# EAGLE board bedofnails (EAGLE 6.5.0)

Size 85.62 x 49.37 mm. Coordinates in mm from the lower left corner, seen from the top.
Outline: 0,49.37 0,0 85.62,0 85.62,49.37 0,49.37
Copper layers (1*16): Top 0.035mm / dielectric 1.5mm / Bottom 0.035mm
Design rules "ITead_rule *": minimum track width 6mil, minimum drill 12mil, track to track 6mil, track to pad 6mil, pad to pad 6mil, via to via 6mil, smd to smd 0mil, copper to edge 10mil, drill to drill 10mil, minimum pad ring 10mil, minimum via ring 6mil, stop-mask expansion 2mil, vias tented up to drill 100mil, thermal gap 10mil
Net classes: 0 default: width 0.203 mm; 1 adc: width 0.203 mm; 2 power: width 0.279 mm, drill 0.254 mm
Holes 0.6 mm at 78.28,34.8 83.23,42.55 9.7,20.45 8.43,30.86 3.48,30.86 4.37,5.71

## Footprints (pad centres in the part's own frame; a part is rotated, then mirrored left to right if it is on the bottom)
SMD-TESTPOINT = smd 1.27 x 0.635: 1 0,0 | hole 0.6: 0,0
KEYSTONE-SMD-TESTPOINT-5015 = smd 2.54 x 1.27: 1 0,0
TESTPAD-PTH-0.7MM = drill 0.7 pad 1.778: 1 0,0
--MERGED_KEYSTONE-SMD-TESTPOINT-5015 = smd 3.429 x 1.778: 1 0,0
STAND-OFF-TIGHT = hole 3.048: 0,0

## Placement (x,y rotation side)
ADC_CLK_TP  TESTPAD  [SMD-TESTPOINT]  50.72,23.24 90 bottom
ADC_NOE_TP  TESTPAD  [SMD-TESTPOINT]  37.95,23.1 90 bottom
CROSS_HI_TP  TESTPAD  [SMD-TESTPOINT]  31.42,9.4 90 bottom
CROSS_LO_TP  TESTPAD  [SMD-TESTPOINT]  33.07,12.57 270 bottom
DBG_TP  TESTPAD  [SMD-TESTPOINT]  39.67,5.59 180 bottom
FPGA_DOUT_TP  TESTPAD  [SMD-TESTPOINT]  43.99,11.56 270 bottom
FPGA_NINIT_TP  TESTPAD  [SMD-TESTPOINT]  58.85,22.23 0 bottom
FPGA_NINIT_TP1  TESTPAD  [SMD-TESTPOINT]  31.78,21.53 90 bottom
FPGA_NINIT_TP2  TESTPAD  [SMD-TESTPOINT]  30.65,23.5 90 bottom
LED_A_TP  TESTPAD  [SMD-TESTPOINT]  61.64,7.49 0 bottom
MISO_TP  TESTPAD  [SMD-TESTPOINT]  54.02,12.32 180 bottom
MOSI_TP  TESTPAD  [SMD-TESTPOINT]  54.78,10.92 180 bottom
NCS_TP  TESTPAD  [SMD-TESTPOINT]  64.69,12.95 0 bottom
OE1_TP  TESTPAD  [SMD-TESTPOINT]  42.08,22.86 270 bottom
OE2_TP  TESTPAD  [SMD-TESTPOINT]  40.29,23.27 270 bottom
OE3_TP  TESTPAD  [SMD-TESTPOINT]  39.67,8 0 bottom
OE4_TP  TESTPAD  [SMD-TESTPOINT]  39.67,6.99 0 bottom
PCK0_TP  TESTPAD  [SMD-TESTPOINT]  44.75,6.1 270 bottom
PWR_HI_TP  TESTPAD  [SMD-TESTPOINT]  39.16,12.83 0 bottom
PWR_LO_TP  TESTPAD  [SMD-TESTPOINT]  39.16,11.56 0 bottom
RELAY_ON_TP  TESTPAD  [SMD-TESTPOINT]  63.8,24.26 270 bottom
SPARE_FPGA_TP  TESTPAD  [SMD-TESTPOINT]  42.97,17.65 0 bottom
SPCK_TP  TESTPAD  [SMD-TESTPOINT]  50.59,5.97 0 bottom
TP1  TESTPAD  [SMD-TESTPOINT]  32.69,27.18 270 bottom
TP2  TESTPADKEYSTONE-SMD  [KEYSTONE-SMD-TESTPOINT-5015]  4.37,5.71 0 bottom
TP3  TESTPADKEYSTONE-SMD  [KEYSTONE-SMD-TESTPOINT-5015]  9.7,20.45 180 top
TP4  TESTPADKEYSTONE-SMD  [KEYSTONE-SMD-TESTPOINT-5015]  8.43,30.86 180 top
TP5  TESTPADKEYSTONE-SMD  [KEYSTONE-SMD-TESTPOINT-5015]  3.48,30.86 180 top
TP6  TESTPAD  [SMD-TESTPOINT]  63.55,7.37 0 bottom
TP8  TESTPAD0.7MM-ROUND-DRILLED  [TESTPAD-PTH-0.7MM]  76.75,32 180 top
TP9  TESTPADKEYSTONE-SMD  [--MERGED_KEYSTONE-SMD-TESTPOINT-5015]  83.23,42.55 90 bottom
TP10  TESTPADKEYSTONE-SMD  [--MERGED_KEYSTONE-SMD-TESTPOINT-5015]  78.28,34.8 180 bottom
TP11  TESTPAD  [SMD-TESTPOINT]  63.04,9.65 0 bottom
TP16  TESTPAD  [SMD-TESTPOINT]  74.95,37.08 90 bottom
TP18  TESTPAD  [SMD-TESTPOINT]  33.83,7.62 0 bottom
TP19  TESTPAD  [SMD-TESTPOINT]  42.72,6.86 180 bottom
TP20  TESTPAD  [SMD-TESTPOINT]  31.92,7.62 0 bottom
TP22  TESTPAD  [SMD-TESTPOINT]  61.13,24.26 270 bottom
TP23  TESTPAD  [SMD-TESTPOINT]  63.87,34.06 180 bottom
TP24  TESTPAD  [SMD-TESTPOINT]  49.07,5.97 0 bottom
TP25  TESTPAD  [SMD-TESTPOINT]  39.92,15.49 180 bottom
TP26  TESTPAD  [SMD-TESTPOINT]  39.16,23 270 bottom
TP28  TESTPAD  [SMD-TESTPOINT]  66.21,23.75 180 bottom
TP29  TESTPAD  [SMD-TESTPOINT]  69.9,21.59 90 bottom
TP30  TESTPAD  [SMD-TESTPOINT]  66.85,16.13 90 bottom
TP31  TESTPAD  [SMD-TESTPOINT]  64.94,9.65 0 bottom
TP32  TESTPAD  [SMD-TESTPOINT]  64.31,11.68 0 bottom
TP33  TESTPAD  [SMD-TESTPOINT]  60.88,21.21 90 bottom
TP34  TESTPAD  [SMD-TESTPOINT]  62.15,20.19 90 bottom
TP35  TESTPAD  [SMD-TESTPOINT]  39.29,16.89 180 bottom
TP48  TESTPAD  [SMD-TESTPOINT]  58.21,17.91 180 bottom
TP49  TESTPAD  [SMD-TESTPOINT]  56.05,18.29 90 bottom
TP50  TESTPAD  [SMD-TESTPOINT]  54.91,17.91 0 bottom
TP51  TESTPAD  [SMD-TESTPOINT]  54.28,19.56 180 bottom
TP52  TESTPAD  [SMD-TESTPOINT]  67.23,18.16 90 bottom
TP53  TESTPAD  [SMD-TESTPOINT]  67.36,19.81 180 bottom
TP54  TESTPAD  [SMD-TESTPOINT]  65.2,26.04 270 bottom
TP55  TESTPAD  [SMD-TESTPOINT]  64.05,26.04 270 bottom
U$1  [STAND-OFF-TIGHT]  1.83,15.88 0 top
U$2  [STAND-OFF-TIGHT]  2.21,46.61 0 top
U$4  [STAND-OFF-TIGHT]  83.23,47.5 0 top
U$12  [L1LOGO]  5.51,38.23 0 top
U$13  [L1LOGO]  5.76,5.33 270 top

## Library data of the parts
ADC_CLK_TP ADC_NOE_TP CROSS_HI_TP CROSS_LO_TP DBG_TP OE1_TP OE2_TP OE3_TP OE4_TP PCK0_TP PWR_HI_TP PWR_LO_TP SPARE_FPGA_TP TP1 = bedofnails; OC_NEWARK: unknown; PARTNO: *
FPGA_DOUT_TP FPGA_NINIT_TP FPGA_NINIT_TP1 FPGA_NINIT_TP2 LED_A_TP MISO_TP MOSI_TP NCS_TP RELAY_ON_TP SPCK_TP TP6 TP11 TP16 TP18-TP20 TP22-TP26 TP28-TP35 TP48-TP55 = bedofnails
TP2-TP5 = STM32-PROX; OC_NEWARK: unknown; PARTNO: *
TP8-TP10 = STM32-PROX; MPN: NONE; OC_NEWARK: unknown; PARTNO: NONE
U$1 U$2 U$4 U$12 U$13 = STM32-PROX

## Nets
!OLED_CS: TP28.1
!RES: TP29.1
+1V2 [power]: TP20.1
+2V5 [power]: TP19.1
+3V3-FPGA [power]: TP18.1
ADC_CLK [adc]: ADC_CLK_TP.1
ADC_IN: TP1.1
ADC_NOE: ADC_NOE_TP.1
AMPL_HI1: TP52.1
AMPL_LO1: TP53.1
ANT_HI: TP3.1
ANT_LO: TP2.1
CROSS_HI: CROSS_HI_TP.1
CROSS_LO: CROSS_LO_TP.1
D/C: TP30.1
DBG: DBG_TP.1
FPGA_CCLK: TP25.1
FPGA_DIN: TP26.1
FPGA_DONE: TP35.1
FPGA_DOUT: FPGA_DOUT_TP.1
FPGA_NINIT: FPGA_NINIT_TP.1
FPGA_NPROGRAM: TP24.1
FPGA_ON: TP22.1
JTRST: TP31.1
LED_A: LED_A_TP.1
MISO: MISO_TP.1
MOSI: MOSI_TP.1
MUXSEL_HIPKD: FPGA_NINIT_TP2.1
MUXSEL_HIRAW: TP33.1
MUXSEL_LOPKD: FPGA_NINIT_TP1.1
MUXSEL_LORAW: TP34.1
N$31: TP4.1
N$32: TP5.1
N$58: SPARE_FPGA_TP.1
NCS: NCS_TP.1
PCK0: PCK0_TP.1
PWR_HI: PWR_HI_TP.1
PWR_LO: PWR_LO_TP.1
PWR_OE1: OE1_TP.1
PWR_OE2: OE2_TP.1
PWR_OE3: OE3_TP.1
PWR_OE4: OE4_TP.1
RELAY_ON: RELAY_ON_TP.1
SCLK/DB0: TP54.1
SD_MISO: TP11.1
SD_MOSI: TP32.1
SD_SCK/TDO: TP6.1
SDIN/DB1: TP55.1
SPCK: SPCK_TP.1
SSP_CLK: TP50.1
SSP_MISO: TP49.1
SSP_MOSI: TP48.1
SSP_NSS: TP51.1
USB_ON: TP23.1

## Text on the board
bDocu: [ NULL SPACE LABS ] | www.layerone.org | http://032.la | Ten Year Anniversary | LayerOne 2014 | mmca / arko / krs | prototype | charliex